# Altium PCB PCB_Stoper_v2.PcbDoc
Units mm, origin at the board's own origin, x right, y up, seen from the top; angles counter-clockwise.
Board outline 70.2 x 31.77 mm, 2 copper layers (Top Layer, Bottom Layer); 35 components, 30 nets, 157 pads, 19 vias.
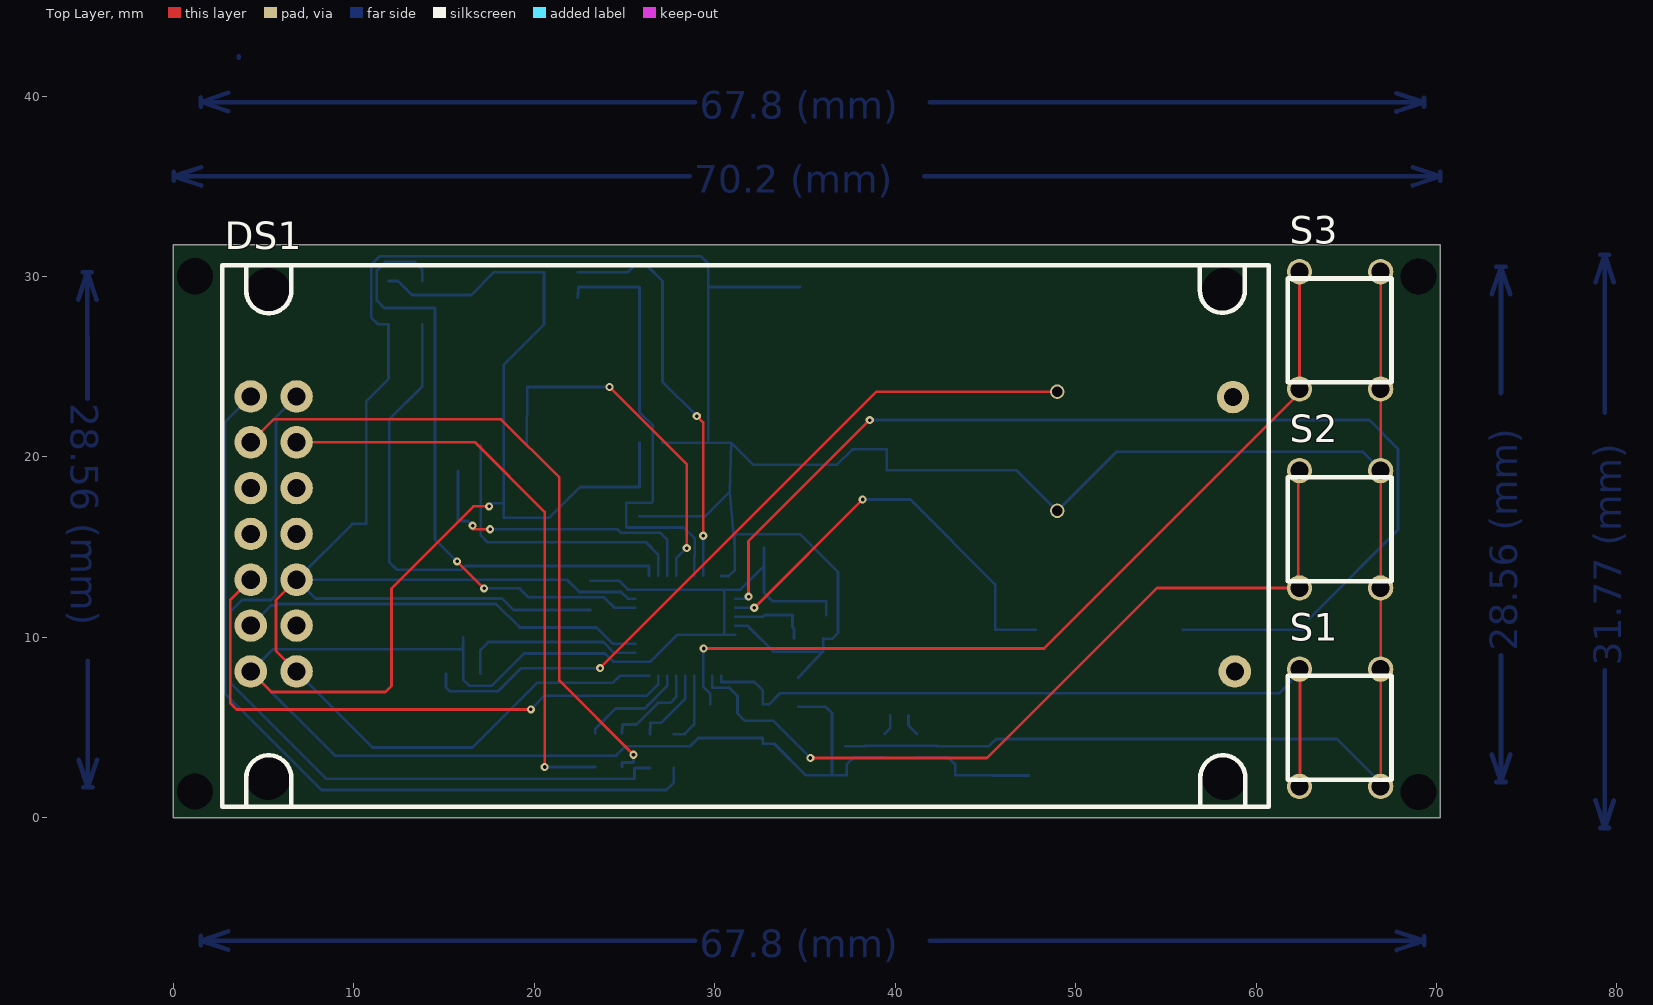
[diagram p0: Top Layer view]
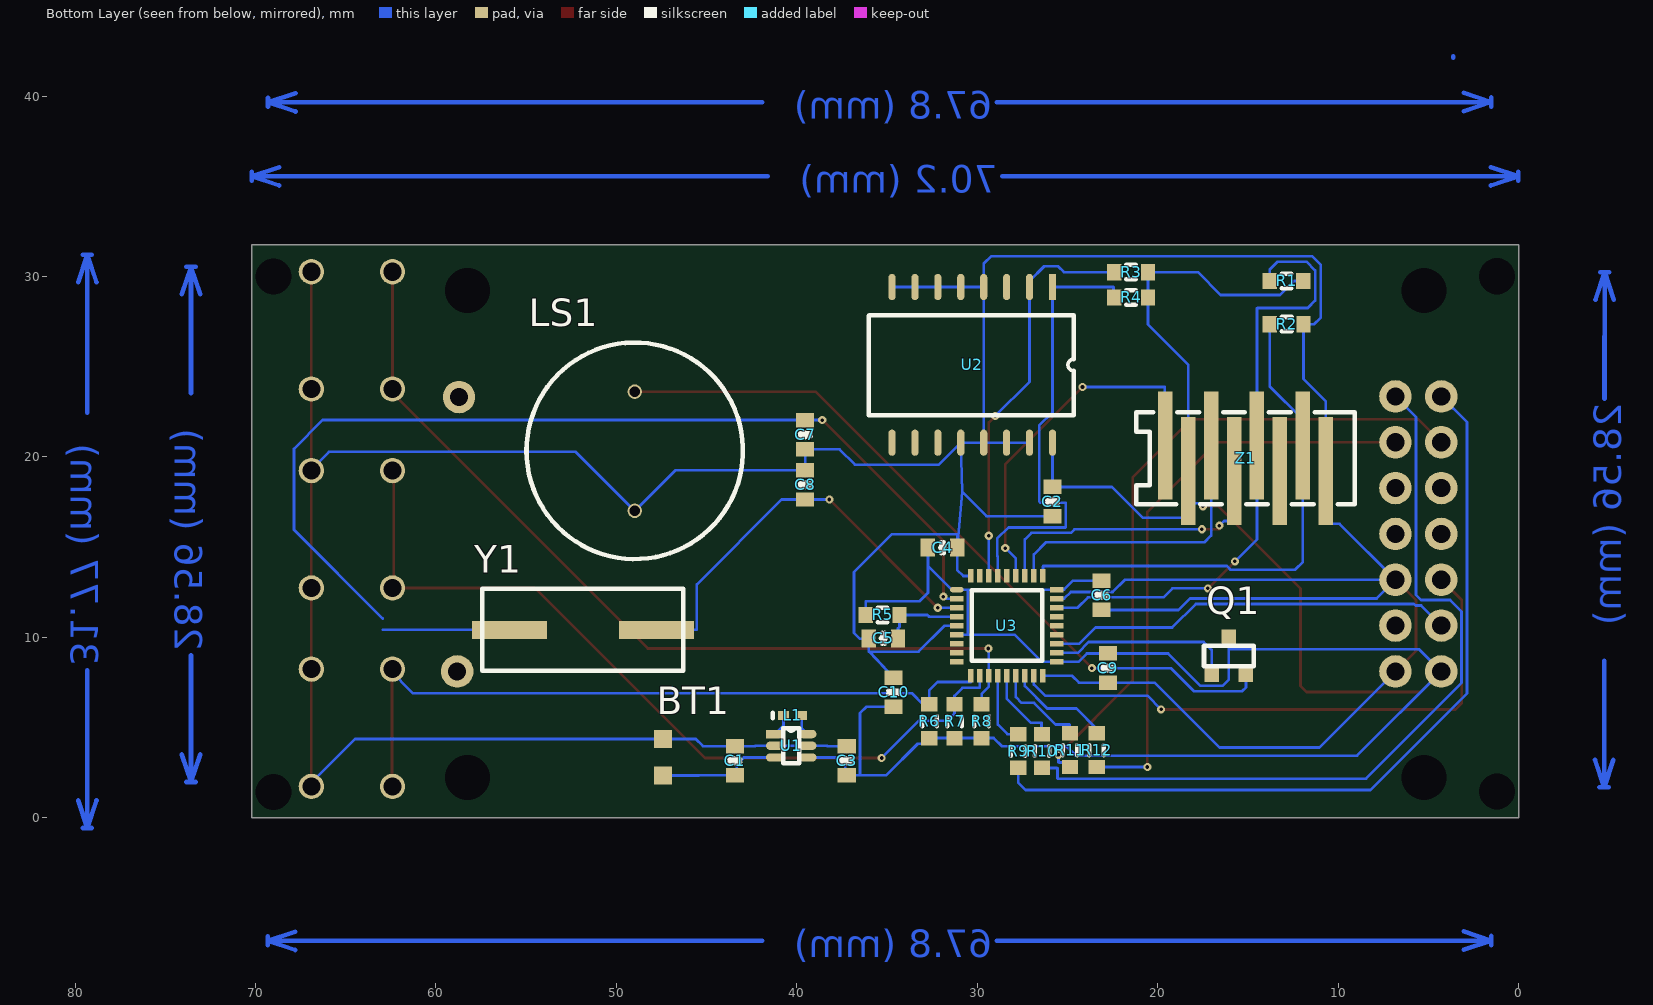
[diagram p1: Bottom Layer view, seen from below]
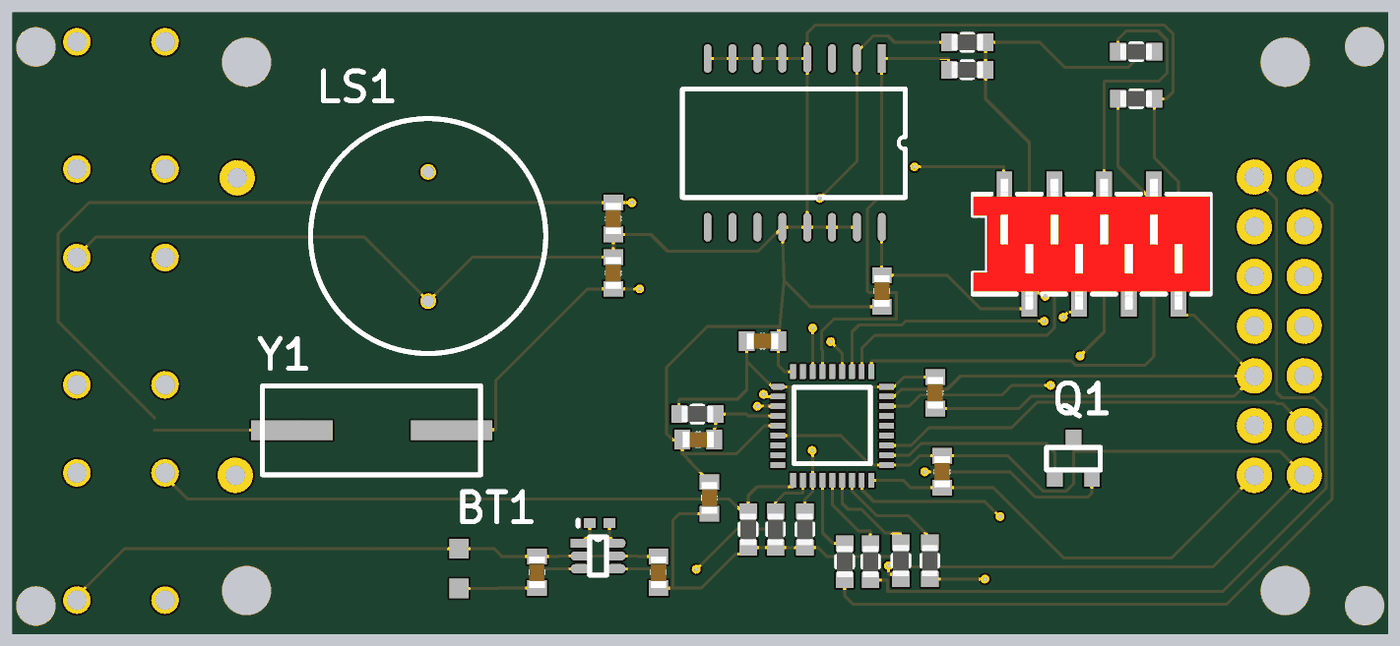
[diagram p2: 3D render of the assembled board from below, using the file's embedded part models]

## Layer stack, top to bottom
Top Solder: solder mask 0.0102, Solder Resist, Dk 3.5
Top Layer: signal copper 0.0356
Dielectric 1: dielectric 0.32, FR-4, Dk 4.8
Bottom Layer: signal copper 0.0356
Bottom Solder: solder mask 0.0102, Solder Resist, Dk 3.5

## Board outline
0,0 70.2,0 70.2,31.77 0,31.77

## Design rules (kind name [scope] priority, off if disabled: settings)
Clearance [All] p1: gap=0.15
ComponentClearance [All] p1: gap=0.1 collisioncheckmode=3 verticalgap=0.1 showdistances=FALSE
HoleSize [All] p1: absolutevalues=TRUE maxlimit=10 minlimit=0.025 maxpercent=80.000 minpercent=20.000
PolygonConnect [All] p1: connectstyle=Relief reliefconductorwidth=0.254 reliefentries=4 polygonreliefangle="90 Angle" airgapwidth=0.254
RoutingVias [All] p1: holewidth=0.2 width=0.45 viastyle="Through Hole" minholewidth=0.1 minwidth=0.4 maxholewidth=10 maxwidth=10
SolderMaskExpansion [All] p1: expansion=0.102
Width [All] p1: maxlimit=10 minlimit=0.15 preferedwidth=0.15
28 further rules are at their usual default settings.

## Components (designator, comment, footprint, x,y, rotation, side; value= is the part's Value field where it differs from the comment)
BT1 "Battery" "BATTERY NEW" 47.408,2.34 r90 bottom
C1 "Cap" C0603 43.434,3.972 r270 bottom
C2 "Cap" C0603 25.833,18.34 r270 bottom
C3 "Cap" C0603 37.234,3.972 r270 bottom
C4 "Cap" C0603 32.734,14.972 r180 bottom
C5 "Cap" C0603 36.011,9.943 r180 bottom
C6 "Cap" C0603 23.111,13.143 r270 bottom
C7 "Cap" C0603 39.536,22.043 r270 bottom
C8 "Cap" C0603 39.536,17.643 r90 bottom
C9 "Cap" C0603 22.758,7.49 r90 bottom
C10 "Cap" C0603 34.634,7.772 r270 bottom
DS1 "LCD8x2" LCD 6.833,8.115 r0 top
L1 "Inductor" 0402-A 40.234,5.672 r180 bottom
LS1 "Buzzer" Buzzer 48.983,23.615 r270 bottom
Q1 "2N7002" 2N7002 16.058,9.99 r180 bottom
R1 "Res" R0603 13.793,29.755 r180 bottom
R2 "Res" R0603 11.918,27.355 r0 bottom
R3 "Res2" R0603 22.408,30.24 r180 bottom
R4 "Res2" R0603 22.408,28.84 r180 bottom
R5 "Res2" R0603 34.311,11.243 r0 bottom
R6 "Res2" R0603 32.658,6.29 r270 bottom
R7 "Res2" R0603 31.258,6.29 r270 bottom
R8 "Res2" R0603 29.758,6.29 r270 bottom
R9 "Res2" R0603 27.733,2.765 r90 bottom
R10 "Res2" R0603 26.408,2.765 r90 bottom
R11 "Res2" R0603 24.858,2.815 r90 bottom
R12 "Res2" R0603 23.383,2.815 r90 bottom
S1 "button" Buttons 62.408,1.74 r0 top
S2 "button" Buttons 62.408,12.74 r0 top
S3 "button" Buttons 62.408,23.765 r0 top
U1 "LTC3525-3.3" LTC3525-3.3 41.211,4.643 r180 bottom
U2 "DS3231" DS3231 25.833,29.415 r270 bottom
U3 "STM32f103tb" VFQFPN36 31.111,12.643 r180 bottom
Y1 "8MHz" "YIC 8.00M-SMDHC49S" 47.783,10.415 r0 bottom
Z1 "prog" AMP4X2S 19.583,20.64 r0 bottom

## Footprints (in the part's own frame and the unit in brackets; to place one, negate y for a bottom-side part, rotate by r counter-clockwise, add the part's x,y. Pads: shape width x height; smd on the part's side, far side on the other; paste and mask are expansions set on the pad)
2N7002 [mm] "MOSFET"
  rect 0.8x0.9 smd: D(0,0) G(-0.95,-2) S(0.95,-2)
  silkscreen extent -1.38,-1.6 1.37,-0.45
0402-A [mm] "Chip Inductor, Body 1.0x0.5mm, IPC High Density"
  rect 0.6x0.5 smd: 1(-0.5,0) 2(0.5,0)
  silkscreen extent -1.1,-0.15 -1.1,0.15, body extent -0.55,-0.3 0.55,0.3, height 0.55
AMP4X2S [mm]
  rect 0.8x6 smd: 1(-0.005,0) 2(-1.275,1.415) 3(-2.545,0) 4(-3.815,1.415) 5(-5.085,0) 6(-6.355,1.415) 7(-7.625,0) 8(-8.895,1.415)
  silkscreen extent -10.49,-1.85 1.6,3.26, body extent -10.49,-2.65 1.6,4.09, height 5.18
"BATTERY NEW" [mm]
  rect 1x1 smd: 1(0,0) 2(2.025,0)
Buttons [mm] "Butttons"
  round 1.4 hole 1: 1(0,0) 2(0,6.5) 3(4.5,0) 4(4.5,6.5)
  silkscreen extent -0.65,0.37 5.1,6.12
Buzzer [mm] "Buzzer with generetor"
  round 0.8 hole 0.6: 1(0,0) 2(6.6,0)
  silkscreen extent -2.72,-6 9.27,6
C0603 [mm]
  rect 0.8x1 smd: 1(0,0) 2(1.62,0)
  silkscreen extent 0.67,-0.3 0.95,0.3, body extent 0.01,-0.4 1.61,0.4, height 0.82
DS3231 [mm]
  rect 1.45x0.4 smd: 1(0,0)
  oval 1.45x0.4 smd: 2(0,-1.27) 3(0,-2.54) 4(0,-3.81) 5(0,-5.08) 6(0,-6.35) 7(0,-7.62) 8(0,-8.89) 9(8.625,-8.89) 10(8.625,-7.62) 11(8.625,-6.35) 12(8.625,-5.08) 13(8.625,-3.81) 14(8.625,-2.54) 15(8.625,-1.27) 16(8.625,0)
  silkscreen extent 1.56,-10.17 7.1,1.19
LCD [mm]
  round 1.8 hole 1: 1(-0.01,0) 2(-2.55,0) 3(-0.01,2.54) 4(-2.55,2.54) 5(-0.01,5.08) 6(-2.55,5.08) 7(-0.01,7.62) 8(-2.55,7.62) 9(-0.01,10.16) 10(-2.55,10.16) 11(-0.01,12.7) 12(-2.55,12.7) 13(-0.01,15.24) 14(-2.55,15.24) A(51.89,15.2) K(51.99,0)
  silkscreen extent -4.12,-7.5 53.88,22.5
LTC3525-3.3 [mm]
  rect 1x0.47 smd: 1(0,0)
  oval 1x0.47 smd: 2(0,-0.65) 3(0,-1.3) 4(1.8,-1.3) 5(1.8,-0.65) 6(1.8,0)
  silkscreen extent 0.46,-1.63 1.33,0.33
R0603 [mm]
  rect 0.8x0.9 smd: 1(0,0) 2(1.87,0)
  silkscreen extent 0.67,-0.4 1.2,0.4, body extent 0.14,-0.4 1.74,0.4, height 0.37
VFQFPN36 [mm]
  oval 0.75x0.3 smd: 1(-0.025,0)
  rect 0.75x0.3 smd: 2(-0.025,-0.5) 3(-0.025,-1) 4(-0.025,-1.5) 5(-0.025,-2) 6(-0.025,-2.5) 7(-0.025,-3) 8(-0.025,-3.5) 9(-0.025,-4) 19(5.525,-4) 20(5.525,-3.5) 21(5.525,-3) 22(5.525,-2.5) 23(5.525,-2) 24(5.525,-1.5) 25(5.525,-1) 26(5.525,-0.5) 27(5.525,0)
  rect 0.3x0.75 smd: 10(0.75,-4.775) 11(1.25,-4.775) 12(1.75,-4.775) 13(2.25,-4.775) 14(2.75,-4.775) 15(3.25,-4.775) 16(3.75,-4.775) 17(4.25,-4.775) 18(4.75,-4.775) 28(4.75,0.775) 29(4.25,0.775) 30(3.75,0.775) 31(3.25,0.775) 32(2.75,0.775) 33(2.25,0.775) 34(1.75,0.775) 35(1.25,0.775) 36(0.75,0.775)
  silkscreen extent 0.8,-3.93 4.7,-0.02
"YIC 8.00M-SMDHC49S" [mm] "YIC 8.00M-SMDHC49S"
  rect 4.15x1 smd: 1(0,0) 2(8.15,0)
  silkscreen extent -1.48,-2.27 9.65,2.28

## Part data
BT1: "Multicell Battery"
C1 C2 C3 C4 C5 C6 C7 C8 C9 C10: "Capacitor"
Q1: library part BS170, "MOSFET BS107"
R1 R2 R3 R4 R5 R6 R7 R8 R9 R10 R11 R12: "Resistor"
S1 S2 S3: "Button"
U2: "RTC DS3231 3.3V"
U3: "STM32f103tb Microcontroller"
Y1: library part XTAL, "Crystal Oscillator"
Z1: library part "Header 4X2", "Header"

## Free pads (board coordinates)
  round 0 hole 2: HOLE(1.2,1.455) HOLE(1.2,30.015) HOLE(69,1.44) HOLE(69,30)
  round 0 hole 2.5: HOLE(5.25,2.225) HOLE(5.25,29.225) HOLE(58.25,2.225) HOLE(58.25,29.225)

## Via types
v1: diameter 0.45, hole 0.2, Top Layer to Bottom Layer, 19 vias

## Nets (pads, with @x,y where several pads share a name; then routed paths per layer and width w, separated by ;. In a path a pad name is that pad's centre, name@x,y a point inside that pad or via, vN(x,y) a via of type N, cw(c..) or ccw(c..) an arc to the next point about the centre after c; other vN are vias at no path point)
3.3V: C2.1 C3.2 C4.1 C6.1 C9.2 C10.2 DS1.2 Q1.D R1.2 R3.2 R4.2 R5.2 R6.2 R7.2 R8.2 U1.4 U2.16 U3.1 U3.6 U3.19 U3.27 Z1.2 | length 153.2
  Top Layer w0.15: DS1.2 5.425,6.973 11.758,6.973 12.088,7.303 12.088,12.713 16.635,17.26 v1(17.498,17.26)
  Bottom Layer w0.15: R1.2 12.446,29.755 13.231,28.969 16.508,28.969 17.778,30.24 R3.2 R4.2 20.538,27.344 18.308,25.114 Z1.2 Z1.2@18.308,17.438 ; v1(17.498,17.26) 17.676,17.438 Z1.2@18.308,17.438 ; C6.1 24.695,13.143 25.195,12.643 U3.27 30.554,12.643 ; U2.16 C2.1 22.528,18.34 20.813,16.625 18.308,16.625 Z1.2@18.308,17.438 ; U3.6 30.554,10.143 ; C4.1 32.734,13.952 ; C10.2 36.151,6.152 36.498,5.805 36.498,2.377 36.523,2.352 ; R5.2 36.181,11.977 36.156,12.002 33.204,12.002 32.734,12.472 32.734,13.952 ; U1.4 37.706,3.343 37.31,2.947 37.31,2.352 C3.2 36.523,2.352 ; 30.554,10.143 30.529,10.168 30.529,12.617 30.554,12.643 ; 30.554,10.143 27.914,10.143 26.414,8.643 U3.19 24.392,8.643 23.925,9.11 C9.2 19.42,9.11 17.625,7.315 16.406,7.315 16.058,7.663 Q1.D 16.033,9.335 5.504,9.335 DS1.2 8.955,3.442 24.525,3.442 25.049,3.966 28.639,3.966 29.093,4.42 R8.2 R7.2 R6.2 32.658,4.103 33.299,4.103 35.05,2.352 36.523,2.352 ; 30.554,12.643 U3.1 31.425,12.643 32.734,13.952
GND: BT1.2 C1.1 C2.2 C3.1 C4.2 C5.1 C6.2 C7.2 C8.2 C9.1 C10.1 DS1.1 DS1.5 LS1.2 R2.1 S1.3 S1.4 S2.3 S2.4 S3.3 S3.4 U1.2 U1.5 U2.4 U2.5 U2.6 U2.7 U2.8 U2.12 U2.13 U2.14 U2.15 U3.5 U3.18 U3.26 U3.36 Z1.8 | length 258.2
  Top Layer w0.15: DS1.1 5.687,9.25 5.687,12.059 DS1.5 ; S3.4@66.908,30.615 66.908,1.94 S1.3@67.108,1.74
  Bottom Layer w0.15: DS1.1 11.038,3.9 16.575,3.9 20.165,7.49 C9.1 24.356,7.49 24.734,7.868 U3.18 ; C6.2 18.845,11.523 18.212,12.155 7.862,12.155 DS1.5 ; U3.26 25.189,12.143 24.814,12.518 22.495,12.518 21.818,13.195 DS1.5 ; C2.2 29.487,16.72 30.825,18.057 ; U2.15 U2.14 U2.13 ; U3.36 30.361,13.399 30.771,13.399 31.114,13.742 C4.2 ; 30.825,18.265 30.825,18.057 ; U3.5 31.824,10.643 33.258,9.208 35.987,9.208 ; C10.1 35.987,9.208 ; U2.8 U2.7 U2.6 U2.5 U2.4 ; C5.1 C5.1@36.011,9.919 ; C3.1 38.301,3.972 38.322,3.993 U1.5 U1.2 42.289,3.993 42.31,3.972 C1.1 45.21,3.972 45.603,4.365 BT1.2 64.483,4.365 S1.3@67.108,1.74 ; S2.4@66.983,19.24 65.94,20.283 52.251,20.283 LS1.2 46.735,19.263 C8.2 C7.2 37.628,20.423 36.78,19.574 32.128,19.574 U2.12 ; DS1.5 9.923,16.295 10.688,16.295 Z1.8 10.688,23.091 11.918,24.321 R2.1 11.328,27.355 10.971,27.712 10.971,30.659 11.441,31.128 29.221,31.128 29.643,30.706 U2.4 ; U2.13 U2.12 ; U2.13 U2.4 ; 30.825,18.057 C4.2 ; 30.825,18.057 U2.12 ; C4.2 31.114,15.685 31.139,15.711 34.745,15.711 36.828,13.628 36.828,10.25 36.498,9.919 C5.1@36.011,9.919 ; 35.987,9.208 36.011,9.208 C5.1@36.011,9.919
JR\S\T\: U3.31 Z1.1 | length 20.3
  Top Layer w0.15: v1(24.169,23.874) 28.446,19.597 v1(28.446,14.949)
  Bottom Layer w0.15: Z1.1 19.607,23.874 v1(24.169,23.874) ; U3.31 27.861,14.364 v1(28.446,14.949)
"JTCK EXT": R2.2 U3.28 Z1.7 | length 29.1
  Bottom Layer w0.15: R2.2 13.788,23.913 11.958,22.083 Z1.7 11.958,14.187 12.396,13.749 15.954,13.749 16.163,13.958 26.336,13.958 26.361,13.933 U3.28
JTDI: U3.29 Z1.3 | length 16.4
  Bottom Layer w0.15: Z1.3 17.038,15.647 17.412,15.273 26.181,15.273 26.861,14.593 U3.29
JTDO: U3.30 Z1.4 | length 16.9
  Top Layer w0.15: v1(16.584,16.193) 16.584,16.015 16.609,15.99 v1(17.549,15.99)
  Bottom Layer w0.15: Z1.4 15.768,16.447 16.33,16.447 v1(16.584,16.193) ; v1(17.549,15.99) 24.612,15.99 24.808,15.795 26.998,15.795 27.361,15.432 U3.30
JTMS: R1.1 U3.25 Z1.5 | length 34.1
  Top Layer w0.15: v1(15.72,14.212) v1(17.218,12.715)
  Bottom Layer w0.15: R1.1 13.793,30.376 13.346,30.824 11.758,30.824 11.275,30.341 11.275,28.665 11.682,28.258 14.473,28.258 14.498,28.233 Z1.5 14.498,15.434 v1(15.72,14.212) ; v1(17.218,12.715) 19.189,12.715 19.686,12.218 23.858,12.218 24.433,11.643 U3.25
NetBT1_1: BT1.1 C1.2 U1.3 | length 7
  Bottom Layer w0.15: U1.3 42.935,3.343 43.33,2.947 43.33,2.352 C1.2 45.413,2.352 45.425,2.34 BT1.1
NetC5_2: C5.2 R5.1 U3.4 | length 4.5
  Bottom Layer w0.15: U3.4 32.662,11.143 32.762,11.243 R5.1 34.311,10.584 34.391,10.504 C5.2
NetC7_1: C7.1 U3.2 Y1.2 | length 61.8
  Top Layer w0.15: v1(31.875,12.256) 31.875,15.33 v1(38.588,22.043)
  Bottom Layer w0.15: U3.2 31.761,12.143 v1(31.875,12.256) ; v1(38.588,22.043) C7.1 66.279,22.043 67.873,20.449 67.873,15.966 62.952,11.045 ; Y1.2 62.952,10.415
NetC8_1: C8.1 U3.3 Y1.1 | length 23.6
  Top Layer w0.15: v1(32.192,11.643) v1(38.192,17.643)
  Bottom Layer w0.15: U3.3 v1(32.192,11.643) ; v1(38.192,17.643) C8.1 40.839,17.643 45.54,12.942 45.54,10.44 Y1.1
NetDS1_4: DS1.4 U3.21 | length 22.7
  Bottom Layer w0.15: DS1.4 5.398,11.77 5.708,11.77 5.794,11.855 17.888,11.855 19.196,10.548 23.451,10.548 24.356,9.643 U3.21
NetDS1_6: DS1.6 U3.17 | length 32.2
  Top Layer w0.15: DS1.6 3.147,12.059 3.147,6.363 3.503,6.008 v1(19.81,6.008)
  Bottom Layer w0.15: v1(19.81,6.008) 20.572,6.77 26.239,6.77 26.861,7.392 U3.17
NetDS1_11: DS1.11 R12.1 | length 32.3
  Top Layer w0.15: DS1.11 16.712,20.815 20.572,16.955 v1(20.572,2.815)
  Bottom Layer w0.15: v1(20.572,2.815) R12.1
NetDS1_12: DS1.12 R11.1 | length 37.3
  Top Layer w0.15: DS1.12 5.554,22.086 18.159,22.086 21.385,18.86 21.385,7.608 v1(25.499,3.493)
  Bottom Layer w0.15: R11.1 24.858,3.061 25.474,3.061 25.499,3.087 v1(25.499,3.493)
NetDS1_13: DS1.13 R10.1 | length 44.4
  Bottom Layer w0.15: DS1.13 5.687,22.219 5.687,12.349 5.408,12.07 3.793,12.07 3.158,11.435 3.158,7.47 8.456,2.172 25.525,2.172 25.55,2.198 25.55,2.739 25.576,2.765 R10.1
NetDS1_14: DS1.14 R9.1 | length 45.1
  Bottom Layer w0.15: DS1.14 2.858,21.93 2.858,6.89 8.21,1.537 27.316,1.537 27.733,1.955 R9.1
NetL1_1: L1.1 U1.1 | length 1.2
  Bottom Layer w0.15: L1.1 40.734,5.12 U1.1
NetL1_2: L1.2 U1.6 | length 1.2
  Bottom Layer w0.15: U1.6 39.734,4.966 L1.2
NetLS1_1: LS1.1 Q1.S | length 41.6
  Top Layer w0.15: v1(23.645,8.294) 38.966,23.615 LS1.1
  Bottom Layer w0.15: Q1.S 15.108,7.227 15.32,7.015 17.997,7.015 19.276,8.294 v1(23.645,8.294)
NetQ1_G: Q1.G U3.20 | length 10.3
  Bottom Layer w0.15: Q1.G 17.008,9.297 17.452,9.742 23.823,9.742 24.422,9.143 U3.20
NetR3_1: R3.1 U2.2 U3.34 | length 22.4
  Top Layer w0.15: v1(29.005,22.264) 29.36,21.908 v1(29.36,15.634)
  Bottom Layer w0.15: R3.1 25.195,30.24 25.525,30.57 26.287,30.57 27.103,29.753 U2.2 27.103,24.165 v1(29.005,22.264) ; U3.34 v1(29.36,15.634)
NetR4_1: R4.1 U2.1 U3.33 | length 25.1
  Bottom Layer w0.15: R4.1 22.447,29.415 U2.1 25.833,22.464 26.566,21.73 26.566,17.539 26.49,17.463 25.118,17.463 25.093,17.438 25.093,16.12 25.118,16.095 28.27,16.095 28.897,15.468 28.897,14.521 28.861,14.485 U3.33
NetR6_1: R6.1 S1.1 S1.2 U3.10 | length 40.9
  Top Layer w0.15: S1.1@62.433,1.74 S1.2@62.433,8.24
  Bottom Layer w0.15: U3.10 30.361,7.527 32.206,7.527 32.658,7.075 R6.1 32.996,6.29 33.603,6.897 61.265,6.897 S1.2@62.608,8.24
NetR7_1: R7.1 S2.1 S2.2 U3.11 | length 45.8
  Top Layer w0.15: v1(35.304,3.315) 45.083,3.315 54.507,12.74 62.333,12.74 62.333,19.09 S2.2@62.483,19.24
  Bottom Layer w0.15: U3.11 29.861,7.227 29.886,7.202 30.813,7.202 31.258,6.757 R7.1 31.258,5.786 31.672,5.373 33.246,5.373 v1(35.304,3.315)
NetR8_1: R8.1 S3.1 S3.2 U3.12 | length 48.9
  Top Layer w0.15: v1(29.387,9.386) 48.254,9.386 62.408,23.54 62.408,30.04 S3.2@62.608,30.24
  Bottom Layer w0.15: v1(29.387,9.386) 29.361,9.36 U3.12 29.361,7.268 29.758,6.871 R8.1
NetR9_2: R9.2 U3.13 | length 4
  Bottom Layer w0.15: R9.2 28.326,4.635 28.861,5.17 U3.13
NetR10_2: R10.2 U3.14 | length 4.4
  Bottom Layer w0.15: R10.2 26.435,5.272 27.042,5.272 28.361,6.591 U3.14
NetR11_2: R11.2 U3.15 | length 5.3
  Bottom Layer w0.15: R11.2 24.883,5.17 25.652,5.17 26.854,6.372 27.541,6.372 27.861,6.692 U3.15
NetR12_2: R12.2 U3.16 | length 5.8
  Bottom Layer w0.15: R12.2 23.383,4.936 24.509,6.062 26.12,6.062 27.361,7.303 U3.16
pads on no net: DS1.3 DS1.7 DS1.8 DS1.9 DS1.10 DS1.A DS1.K U2.3 U2.9 U2.10 U2.11 U3.7 U3.8 U3.9 U3.22 U3.23 U3.24 U3.32 U3.35 Z1.6
copper on no net: | length 257.1
  Bottom Layer w0.254: -5.279,28.718 -4.773,30.242 ; -5.252,3.206 -4.743,1.682 ; -5.027,30.242 -4.519,30.242 ; -4.997,1.682 -4.489,1.682 ; -4.765,23.224 -4.773,30.242 ; -4.75,8.7 -4.743,1.682 ; -4.263,28.719 -4.773,30.242 ; -4.236,3.207 -4.743,1.682 ; 0.009,35.298 0.009,35.806 ; 1.51,39.415 1.51,39.923 ; 1.522,-7.059 1.522,-6.551 ; 1.533,35.044 0.009,35.552 ; 1.533,36.06 0.009,35.552 ; 3.033,39.161 1.51,39.669 ; 3.034,40.177 1.51,39.669 ; 3.046,-7.313 1.522,-6.805 ; 3.046,-6.297 1.522,-6.805 ; 3.63,42.128 3.63,42.21 ; 28.609,35.552 0.009,35.552 ; 28.909,39.663 1.51,39.669 ; 28.921,-6.811 1.522,-6.805 ; 41.609,35.552 70.209,35.552 ; 41.91,39.66 69.31,39.654 ; 41.922,-6.814 69.322,-6.82 ; 67.785,39.146 69.31,39.654 ; 67.786,40.162 69.31,39.654 ; 67.798,-7.327 69.322,-6.82 ; 67.798,-6.311 69.322,-6.82 ; 68.685,35.044 70.209,35.552 ; 68.685,36.06 70.209,35.552 ; 69.31,39.4 69.31,39.908 ; 69.322,-7.074 69.322,-6.566 ; 70.209,35.298 70.209,35.806 ; 73.068,3.507 73.576,1.983 ; 73.068,29.019 73.576,30.543 ; 73.322,1.983 73.83,1.983 ; 73.322,30.543 73.83,30.543 ; 73.576,9.001 73.576,1.983 ; 73.576,23.525 73.576,30.543 ; 74.084,3.507 73.576,1.983 ; 74.084,29.019 73.576,30.543 ; 78.812,0.959 79.32,-0.565 ; 78.812,29.681 79.32,31.205 ; 79.066,-0.565 79.574,-0.565 ; 79.066,31.205 79.574,31.205 ; 79.32,8.185 79.32,-0.565 ; 79.32,22.455 79.32,31.205 ; 79.828,0.959 79.32,-0.565 ; 79.828,29.681 79.32,31.205

## Other copper
Bottom Layer:
  text "67.8 (mm)" at 29.163,38.749 h1.52 r359.99
  text "70.2 (mm)" at 28.863,34.638 h1.52
  text "28.56 (mm)" at -5.679,22.969 h1.52 r270.06
  text "28.56 (mm)" at 74.49,9.255 h1.52 r90
  text "31.77 (mm)" at 80.234,8.439 h1.52 r90
  text "67.8 (mm)" at 29.175,-7.725 h1.52 r359.99